# Altium PCB sonar_test.PcbDoc
Units mil, origin at the board's own origin, x right, y up, seen from the top; angles counter-clockwise.
Board outline 1630 x 1365 mil, 2 copper layers (Top Layer, Bottom Layer); 83 components, 50 nets, 234 pads, 77 vias.
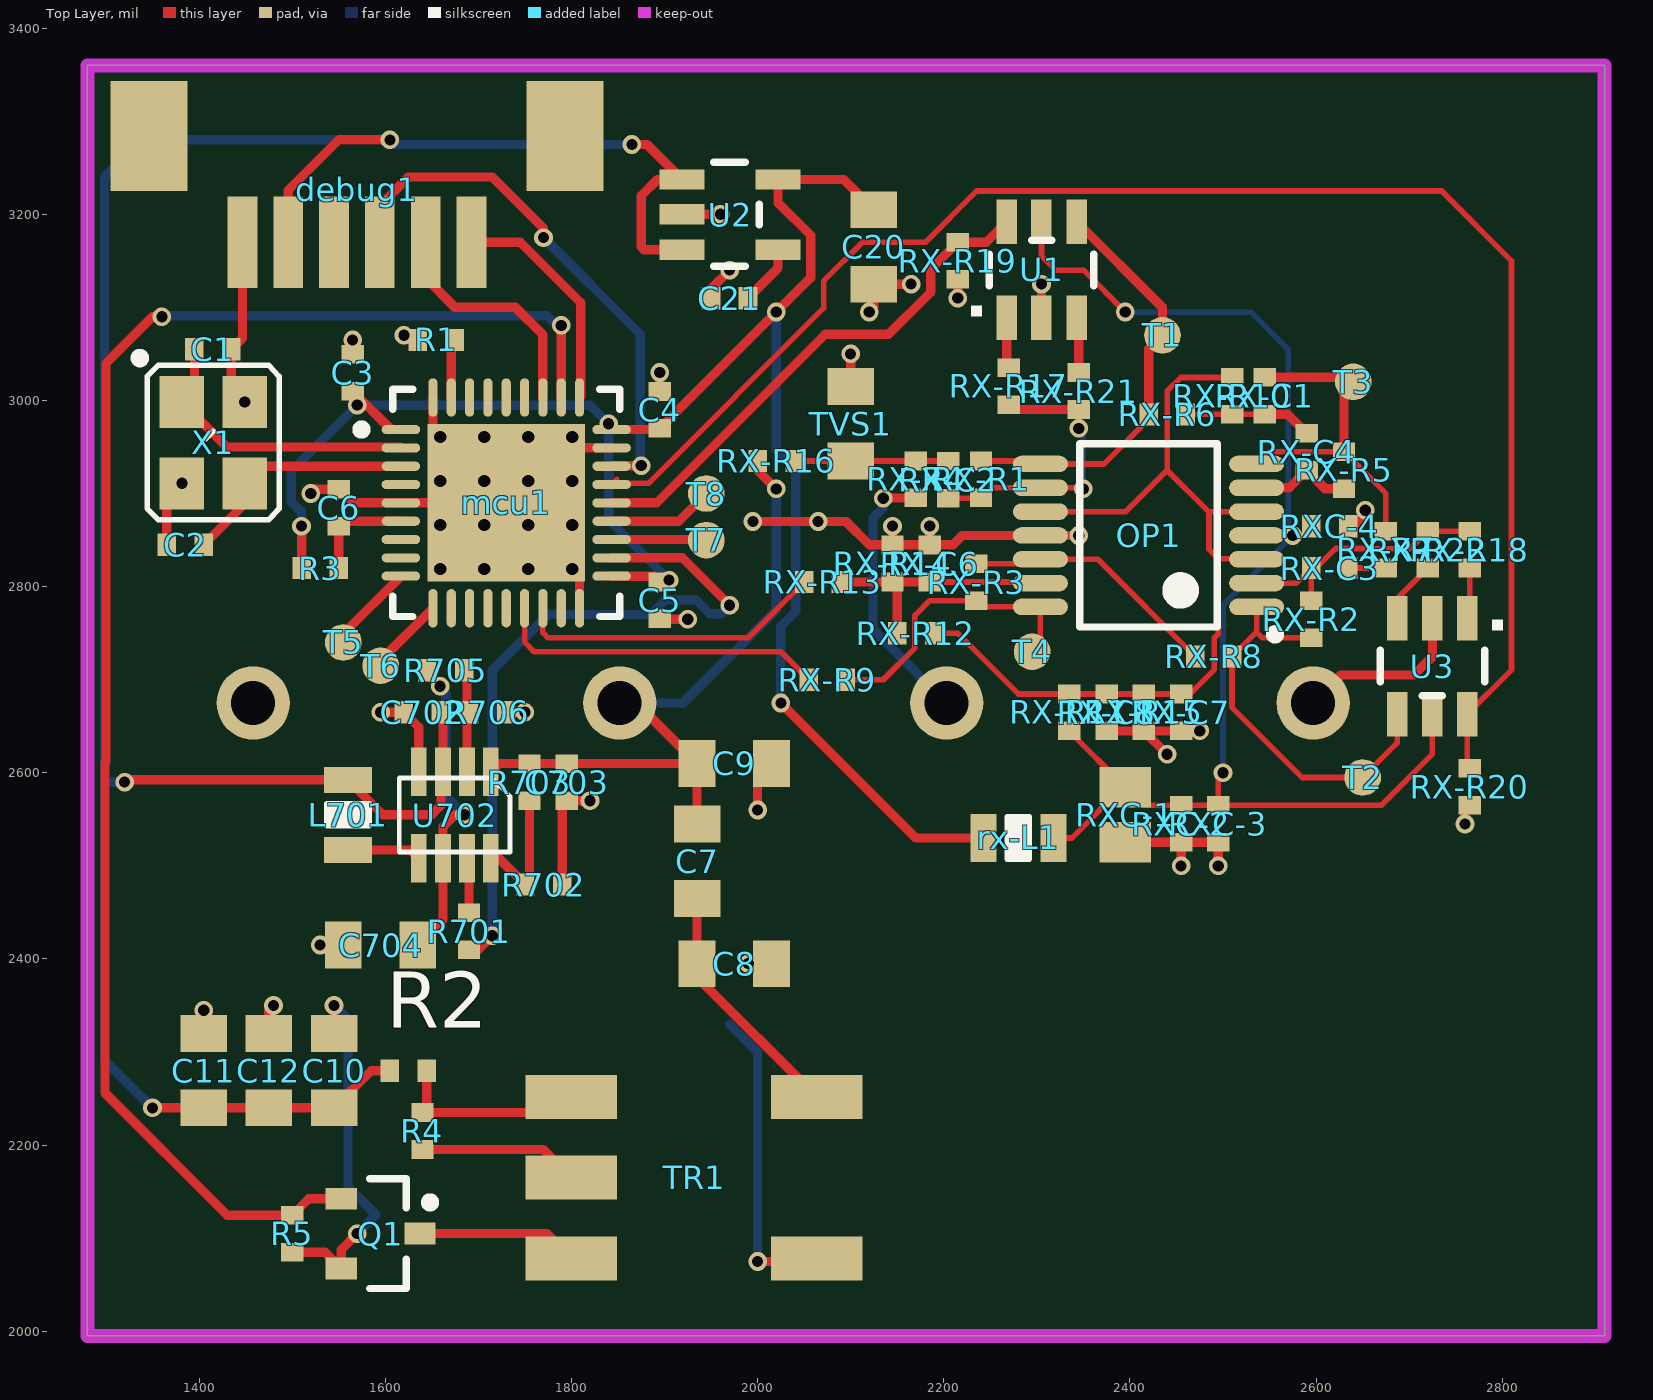
[diagram p0: Top Layer view]
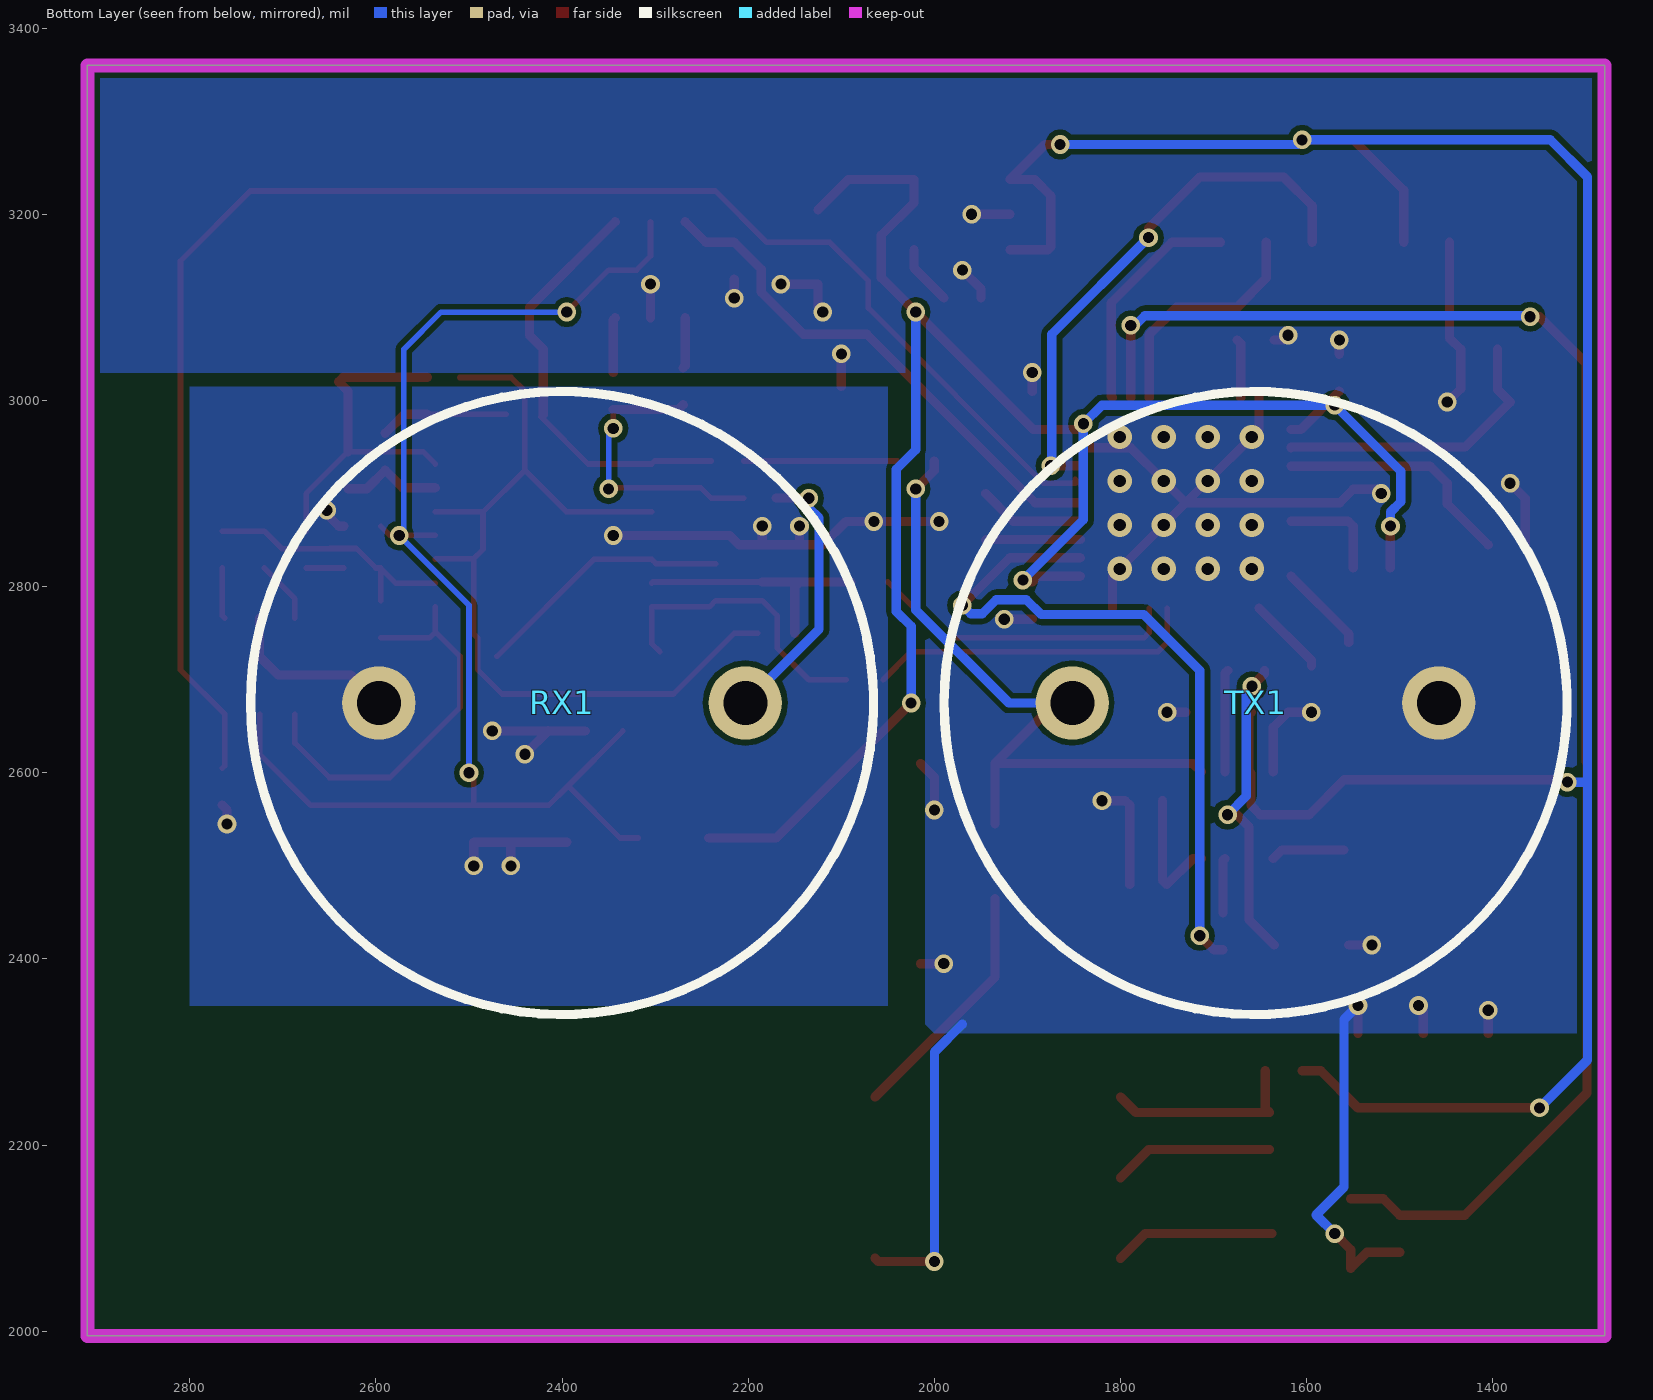
[diagram p1: Bottom Layer view, seen from below]

## Layer stack, top to bottom
Top Solder: solder mask 0.4, Solder Resist, Dk 3.5
Top Layer: signal copper 1.4
Dielectric 1: dielectric 12.6, FR-4, Dk 4.8
Bottom Layer: signal copper 1.4
Bottom Solder: solder mask 0.4, Solder Resist, Dk 3.5

## Board outline
1280,1995 2910,1995 2910,3360 1280,3360

## Design rules (kind name [scope] priority, off if disabled: settings)
Clearance [All] p1: gap=6
MinimumSolderMaskSliver [All] p1 off: minsoldermaskwidth=10
PlaneConnect [All] p1: planeconnectstyle=Direct reliefexpansion=20 reliefentries=4 reliefconductorwidth=10 reliefairgap=10
PolygonConnect [All] p1: connectstyle=Direct reliefconductorwidth=10 reliefentries=4 polygonreliefangle="90 Angle" airgapwidth=10
RoomDefinition MCU [InComponentClass('MCU')] p1 off: confinementstyle=ConfineIn formatcopy=TRUE lockcomponents=FALSE outline -15,-1020 1985,-1020 1985,-20 -15,-20
RoomDefinition sonar_tx [InComponentClass('sonar_tx')] p2 off: confinementstyle=ConfineIn formatcopy=TRUE lockcomponents=FALSE outline -15,-1020 1985,-1020 1985,-20 -15,-20
RoomDefinition sonar_rx [InComponentClass('sonar_rx')] p3 off: confinementstyle=ConfineIn formatcopy=TRUE lockcomponents=FALSE outline 7030,-45 7345,-45 7345,135 7030,135
RoutingVias [All] p1: holewidth=12 width=20 viastyle="Through Hole" minholewidth=12 minwidth=20 maxholewidth=28 maxwidth=50
SilkToBoardRegionClearance [All] p1 off:
SilkToSilkClearance [All] p1 off: silktosilkclearance=10
SilkToSolderMaskClearance [IsPad] p1 off: minsilkscreentomaskgap=10 clearancetoexposedcopper=TRUE
SolderMaskExpansion [All] p1: expansion=4
UnpouredPolygon [All] p1: allowunpoured=FALSE
Width [All] p1: maxlimit=10 minlimit=6 preferedwidth=6
24 further rules are at their usual default settings.

## Classes and differential pairs
component class MCU: C1 C2 C3 C4 C5 C6 C20 C21 debug1 mcu1 R1 R3 T5 T6 T7 T8 U2 X1
component class sonar_rx: OP1 RX1 RX-C1 RX-C2 RX-C3 RX-C4 RX-C6 RX-C7 RX-C8 rx-L1 RX-R1 RX-R2 RX-R3 RX-R4 RX-R5 RX-R6 RX-R7 RX-R8 RX-R9 RX-R10 RX-R11 RX-R12 RX-R13 RX-R14 RX-R15 RX-R16 RX-R17 RX-R18 RX-R19 RX-R20 RX-R21 RX-R22 RXC-1 RXC-2 RXC-3 RXC-4 T1 T2 T3 T4 TVS1 U1 U3
component class sonar_tx: C7 C8 C9 C10 C11 C12 C702 C703 C704 L701 Q1 R2 R4 R5 R701 R702 R703 R705 R706 TR1 TX1 U702

## Components (designator, comment, footprint, x,y, rotation, side; value= is the part's Value field where it differs from the comment)
C1 "Cap" 0402 1415,3055 r180 top
C2 "Cap" 0402 1385,2845 r0 top
C3 "Cap" 0402 1565,3030 r270 top
C4 "Cap" 0402 1895,2990 r270 top
C5 "Cap" 0402 1895,2785 r90 top
C6 "Cap" 0402 1550,2885 r270 top
C7 "Cap" 0805 1935,2505 r270 top
C8 "Cap" 0805 1975,2395 r0 top
C9 "Cap" 0805 1975,2610 r0 top
C10 "Cap" 0805 1545,2280 r90 top
C11 "Cap" 0805 1405,2280 r90 top
C12 "Cap" 0805 1475,2280 r90 top
C20 "Cap" 0805 2125,3165 r270 top
C21 "Cap" 0402 1970,3110 r180 top
C702 "1u" 0402 1640,2665 r180 top
C703 "5n6" 0402 1795,2590 r270 top
C704 "10uf/0805" 0805 1595,2415 r180 top
debug1 "debug" WFRSM125 1545,3170 r180 top
L701 "47uH/200mA" 0805-IND 1560,2555 r270 top
mcu1 "STM32F103T8U6" VFQN36_N 1730,2890 r0 top
OP1 "LM324" TSSOP14_44MM_065P 2420,2855 r180 top
Q1 "NMOS" SOT23_L 1595,2105 r0 top
R1 "Res2" 0402 1655,3065 r180 top
R2 "NC/0R" 0402 1625,2280 r180 top
R3 "Res2" 0402 1530,2820 r0 top
R4 "NC/0R" 0402 1640,2215 r90 top
R5 "10k" 0402 1500,2105 r270 top
R701 "10k" 0402 1690,2430 r270 top
R702 "10k" 0402 1770,2480 r0 top
R703 "100k" 0402 1755,2590 r270 top
R705 "453K 1%" 0402 1665,2710 r0 top
R706 "16.5k 1%" 0402 1710,2665 r0 top
RX1 "sonar" sonar-16mm 2400,2675 r180 bottom
RX-C1 "1nF" 0402 2545,3005 r90 top
RX-C2 "10nF" 0402 2205,2915 r270 top
RX-C3 "1nF" 0402 2615,2820 r180 top
RX-C4 "1nF" 0402 2590,2945 r270 top
RX-C6 "10nF" 0402 2185,2825 r270 top
RX-C7 "4.7uF" 0402 2455,2665 r270 top
RX-C8 "100nF" 0402 2375,2665 r270 top
rx-L1 "47uH" 0805-IND 2280,2530 r0 top
RX-R1 "91k" 0402 2240,2915 r90 top
RX-R2 "120k" 0402 2595,2765 r270 top
RX-R3 "120k" 0402 2235,2805 r270 top
RX-R4 "10k" 0402 2170,2915 r90 top
RX-R5 "36k" 0402 2630,2925 r90 top
RX-R6 "18k" 0402 2440,2985 r0 top
RX-R7 "10k" 0402 2675,2840 r270 top
RX-R8 "2k" 0402 2490,2725 r180 top
RX-R9 "1k /0R" 0402 2075,2700 r180 top
RX-R10 "430Ω" 0402 2510,3005 r270 top
RX-R11 "1k" 0402 2335,2665 r270 top
RX-R12 "120k" 0402 2170,2750 r180 top
RX-R13 "12k" 0402 2070,2805 r180 top
RX-R14 "3.3m" 0402 2145,2825 r270 top
RX-R15 "1k" 0402 2415,2665 r90 top
RX-R16 "NC/10k" 0402 2020,2935 r0 top
RX-R17 "91k" 0402 2270,3015 r90 top
RX-R18 "91k" 0402 2765,2840 r270 top
RX-R19 "91k" 0402 2215,3150 r90 top
RX-R20 "91k" 0402 2765,2585 r90 top
RX-R21 "91k" 0402 2345,3010 r90 top
RX-R22 "91k" 0402 2720,2840 r270 top
RXC-1 "47uF" C0805 2395,2555 r90 top
RXC-2 "1nF" 0402 2455,2545 r90 top
RXC-3 "10nF" 0402 2495,2545 r90 top
RXC-4 "100nF" 0402 2615,2865 r180 top
T1 "TestPad" "TestPad - 1mm" 2435,3070 r0 top
T2 "TestPad" "TestPad - 1mm" 2650,2595 r0 top
T3 "TestPad" "TestPad - 1mm" 2640,3020 r0 top
T4 "TestPad" "TestPad - 1mm" 2295,2730 r0 top
T5 "TestPad" "TestPad - 1mm" 1555,2740 r0 top
T6 "TestPad" "TestPad - 1mm" 1595,2715 r0 top
T7 "TestPad" "TestPad - 1mm" 1945,2850 r0 top
T8 "TestPad" "TestPad - 1mm" 1945,2900 r0 top
TR1 "Transformer_B78416A2232A003" Transformer_B78416A2232A003 1800,2165 r270 top
TVS1 "tvs/5V" 0805 2100,2975 r270 top
TX1 "sonar" sonar-16mm 1655,2675 r180 bottom
U1 "TS5A3159" SOT23-6 2305,3140 r0 top
U2 "LP5907" SOT23-5 1970,3200 r270 top
U3 "TS5A3159" SOT23-6 2725,2715 r180 top
U702 "LT3469" SOT23-8 1675,2555 r180 top
X1 "24.000 KHz 3.2x2.5mm 8-10pf" OSCILLATOR-3.2X2.5 1415,2955 r270 top

## Footprints (in the part's own frame and the unit in brackets; to place one, negate y for a bottom-side part, rotate by r counter-clockwise, add the part's x,y. Pads: shape width x height; smd on the part's side, far side on the other; paste and mask are expansions set on the pad)
0402 [mil] "0402-RES"
  rect 20x24 smd: 1(-19.69,0) 2(20,0)
0805 [mil]
  rect 39.37x50 smd: 1(-40,0) 2(40,0)
  body extent -50,-30 50,30, height 31
0805-IND [mil] "0805-IND"
  rect 28x52 smd: 1(-37.4,0) 2(38,0)
  silkscreen extent -12,-23 12,23
C0805 [mm] "Chip Capacitor, Body 2.0x1.3mm, IPC High Density"
  rect 1.1x1.4 smd: 1(-0.75,0) 2(0.75,0)
  body extent -1.1,-0.72 1.1,0.72, height 1.4
OSCILLATOR-3.2X2.5 [mil] "OSCILLATOR-3.2X2.5"
  rect 56x48 smd: 1(-43.31,-33.46) 2(44,-33.46) 3(44,34) 4(-43.31,34)
  silkscreen extent -95,-83 83,71
sonar-16mm [mm]
  round 2 hole 1.2: 1(-5,0) 2(5,0)
  silkscreen extent -8.5,-8.5 8.5,8.5, body extent -7.94,-7.98 8,7.98, height 12
SOT23-5 [mil] "SOT23-5"
  rect 22x48 smd: 1(-37.4,-51.18) 2(0,-51.18) 3(38,-51.18) 4(38,52) 5(-37.4,52)
  silkscreen extent -56,-17 56,32
SOT23-6 [mil] "SOT23-5"
  rect 22x48 smd: 1(-37.4,-51.18) 2(0,-51.18) 3(38,-51.18) 4(38,52) 5(0,52.01) 6(-37.4,52)
  silkscreen extent -76,-50 56,32
SOT23-8 [mil] "SOT23-8"
  rect 17x52 smd: 1(-38.39,-46.26) 2(-12.8,-46.26) 3(13,-46.26) 4(39,-46.26) 5(39,47) 6(13,47) 7(-12.8,47) 8(-38.39,47)
  silkscreen extent -59,-39 60,40
SOT23_L [mm] "SOT23, 3-Leads, Body 2.9x1.3mm, Pitch 0.95mm, Lead Span 2.3mm - Reverse Pinning, IPC High Density"
  rect 0.85x0.6 smd: 1(1.075,0) 2(-1.075,-0.95) 3(-1.075,0.95)
  silkscreen extent -0.3,-1.5 1.48,1.5, body extent -0.7,-1.5 0.7,1.5, height 1.1
"TestPad - 1mm" [mm]
  round 1 smd: 1(0,0)
Transformer_B78416A2232A003 [mm]
  rect 1.2x2.5 smd: 1(-2.2,0) 2(0,0) 3(2.2,0) 4(2.2,6.7) 5(-2.2,6.7)
TSSOP14_44MM_065P [mm]
  oval 1.5x0.45 smd: 1(-2.95,1.95) 2(-2.95,1.3) 3(-2.95,0.65) 4(-2.95,0) 5(-2.95,-0.65) 6(-2.95,-1.3) 7(-2.95,-1.95) 8(2.95,-1.95) 9(2.95,-1.3) 10(2.95,-0.65) 11(2.95,0) 12(2.95,0.65) 13(2.95,1.3) 14(2.95,1.95)
  silkscreen extent -3.58,-2.5 1.87,2.82
VFQN36_N [mm]
  rect 4.3x4.3 smd: 0(0,0)
  oval 1.05x0.25 smd: 1(-2.875,2) 2(-2.875,1.5) 3(-2.875,1) 4(-2.875,0.5) 5(-2.875,0) 6(-2.875,-0.5) 7(-2.875,-1) 8(-2.875,-1.5) 9(-2.875,-2) 19(2.875,-2) 20(2.875,-1.5) 21(2.875,-1) 22(2.875,-0.5) 23(2.875,0) 24(2.875,0.5) 25(2.875,1) 26(2.875,1.5) 27(2.875,2)
  oval 0.25x1.05 smd: 10(-2,-2.875) 11(-1.5,-2.875) 12(-1,-2.875) 13(-0.5,-2.875) 14(0,-2.875) 15(0.5,-2.875) 16(1,-2.875) 17(1.5,-2.875) 18(2,-2.875) 28(2,2.875) 29(1.5,2.875) 30(1,2.875) 31(0.5,2.875) 32(0,2.875) 33(-0.5,2.875) 34(-1,2.875) 35(-1.5,2.875) 36(-2,2.875)
  silkscreen extent -4.07,-3.1 3.1,3.1
WFRSM125 [mm]
  rect 0.81x2.5 smd: 1(-3.75,0) 2(-2.5,0) 3(-1.25,0) 4(0,0) 5(1.25,0) 6(2.5,0)
  rect 2.1x3 smd: shell(-6.3,-2.9) shell(5.05,-2.9)
  body extent -6.79,-3.82 5.46,0.38, height 3.4

## Part data
C1 C2 C3 C4 C5 C6 C7 C8 C9 C10 C11 C12 C20 C21: "Capacitor"
C702 RX-C7 RX-C8: library part CAP0603, "<b>Capacitor</b> / Standard 0603 ceramic capacitor, and 0.1\" leaded capacitor."
C703 C704: library part CAP0402, "<b>Capacitor</b> / Standard 0603 ceramic capacitor, and 0.1\" leaded capacitor."
L701 rx-L1: library part INDUCTOR0805, "<b>Inductors</b> / Basic Inductor/Choke - 0603 and 1210. Footprints are not proven and vary greatly between part numbers. / SRR1210: Bourns SRR1210 parts, e.g. SRR1210-100M"
mcu1: "STM32 ARM-based 32-bit MCU with 64 Kbytes Flash, 36-pin VFQFPN, Industrial Temperature"
OP1: library part OP-SOP14
R1 R3: "Resistor"
R2 R4 R5 R701 R702 R703 R705 R706: library part RESISTOR0402-RES, "<b>Resistor</b> / Basic schematic elements and footprints for 0603, 1206, and PTH 1/10th watt (small) resistors."
RX-C1 RX-C2 RX-C3 RX-C4 RX-C6 RXC-2 RXC-3 RXC-4: library part CAP0603H, "<b>Capacitor</b> / Standard 0603 ceramic capacitor, and 0.1\" leaded capacitor."
RX-R1 RX-R2 RX-R3 RX-R4 RX-R5 RX-R6 RX-R7 RX-R8 RX-R9 RX-R10 RX-R11 RX-R12 RX-R13 RX-R14 RX-R15 RX-R16 RX-R17 RX-R18 RX-R19 RX-R20 RX-R21 RX-R22: library part RESISTOR0603B, "<b>Resistor</b> / Basic schematic elements and footprints for 0603, 1206, and PTH 1/10th watt (small) resistors."
RXC-1: library part Cap2, "Capacitor"
TVS1: library part Diode, "Default Diode"
U702: "LT3469 Piezo microactuator driver with boost regulator"
X1: library part OSCILLATOR-3.2X2.5, "Crystal Oscillator in 3.2x2.5 SMD"

## Via types
v1: diameter 20, hole 12, Top Layer to Bottom Layer, 61 vias
v2: diameter 25.98, hole 12.99, Top Layer to Bottom Layer, tented both sides, 16 vias

## Nets (pads, with @x,y where several pads share a name; then routed paths per layer and width w, separated by ;. In a path a pad name is that pad's centre, name@x,y a point inside that pad or via, vN(x,y) a via of type N, cw(c..) or ccw(c..) an arc to the next point about the centre after c; other vN are vias at no path point)
3.3D: C3.2 C4.2 C5.2 C20.1 mcu1.1 mcu1.19 mcu1.27 R3.1 rx-L1.1 U2.5 | length 2048.4
  Top Layer w10: v1(1510,2865) 1510.32,2864.68 R3.1 ; C3.2 1606.26,2968.74 mcu1.1 ; mcu1.19 1888.74,2811.26 C5.2 1905,2805 v1(1905,2807) ; mcu1.27 1893.74,2968.74 C4.2 v1(2020,3095) 2057,3132 2057,3177.56 2022,3212.56 U2.5 2092.6,3237.4 C20.1 ; v1(2025,2675) 2170,2530 rx-L1.1
  Bottom Layer w10: v1(1510,2865) 1510,2880.3 1499,2891.3 1499,2924 v1(1570,2995) 1820,2995 v1(1840,2975) 1840,2872 v1(1905,2807) ; v1(2020,3095) 2020,2947 2041,2926 2041,2773.37 2025,2757.37 v1(2025,2675)
5V: C10.1 C11.1 C12.1 C702.1 debug1.5 L701.1 R2.2 U2.1 U2.3 U702.3 | length 2769.9
  Top Layer w10: v1(1320,2590) 1322.4,2592.4 L701.1 1597.4,2555 1650,2555 1660,2565 1660,2599.26 U702.3 1662,2662.69 C702.1 ; v1(1350,2240) C11.1 C12.1 C10.1 1585,2280 R2.2 ; debug1.5 1495.79,3225.79 1550,3280 v1(1605,3280) ; v1(1865,3275) 1881.22,3275 U2.1 1892.4,3237.4 1875,3220 1875,3165 1878,3162 U2.3
  Bottom Layer w10: v1(1320,2590) 1298.5,2590 ; v1(1350,2240) 1298.5,2291.5 1298.5,2590 ; v1(1865,3275) 1610,3275 v1(1605,3280) 1338.5,3280 1298.5,3240 1298.5,2590
GND: C1.1 C2.1 C3.1 C4.1 C5.1 C6.1 C8.2 C9.2 C10.2 C11.2 C12.2 C20.2 C21.2 C702.2 C703.2 C704.2 debug1.6 mcu1.0 mcu1.5 mcu1.18 mcu1.26 mcu1.36 OP1.11 Q1.2 R1.2 R5.2 R702.2 R706.2 RX1.1 RX-C6.1 RX-C7.2 RX-C8.2 RX-R14.1 RX-R15.1 RX-R19.1 RX-R20.1 RXC-1.1 RXC-2.1 RXC-3.1 RXC-4.1 TR1.4 TVS1.1 TX1.2 U1.2 U2.2 U3.2 U702.4 X1.2 X1.4 | length 3294.9
  Top Layer w10: C2.1 1365.32,2894.78 v1(1381.54,2911) ; C11.2 v1(1405,2345) ; debug1.6 1446.57,3066.89 C1.1 1434.69,3012.62 v1(1449,2998.31) ; C12.2 1475,2345 v1(1480,2350) ; R5.2 1535.28,2085 Q1.2 1552.68,2087.68 v1(1570,2105) ; v1(1520,2900) 1524.68,2904.68 C6.1 1564.68,2890 mcu1.5 mcu1.0 ; v1(1530,2415) C704.2 ; C10.2 v1(1545,2350) ; C3.1 v1(1565,3065) ; v1(1595,2665) C702.2 1636,2649 U702.4 ; v1(1620,3070) 1625,3065 R1.2 ; mcu1.36 1651.26,2968.74 v2(1659.13,2960.87) v2(1706.38,2913.62) mcu1.0 ; R706.2 v1(1750,2665) ; R702.2 1790,2565 C703.2 v1(1820,2570) ; mcu1.18 1808.74,2811.26 v2(1800.87,2819.13) v2(1753.62,2866.38) mcu1.0 ; mcu1.26 1789.06,2949.06 v2(1753.62,2913.62) mcu1.0 ; C5.1 1895.32,2765 v1(1925,2765) ; C4.1 v1(1895,3030) ; U2.2 v1(1960,3200) ; C21.2 1950,3120 v1(1970,3140) ; v1(1990,2395) C8.2 ; v1(1995,2870) v1(2065,2870) 2095,2870 2120,2845 RX-R14.1@2145,2845 ; v1(2000,2075) 2060.39,2075 TR1.4 ; v1(2000,2560) 2000,2595 C9.2 ; TVS1.1 v1(2100,3050) ; v1(2120,3095) 2125,3100 C20.2 v1(2165,3125) ; RX-R14.1 RX-R14.1@2145,2845 ; v1(2145,2865) RX-R14.1@2145,2845 ; RX-C6.1 RX-C6.1@2185,2845 ; v1(2185,2865) RX-C6.1@2185,2845 ; v1(2215,3110) RX-R19.1 ; U1.2 v1(2305,3125) ; v1(2345,2855) OP1.11 2220,2855 2210,2845 RX-C6.1@2185,2845 ; RX-C8.2 RX-R15.1@2415,2645 ; RXC-1.1 2494.84,2525.47 RXC-3.1 v1(2495,2500) ; RX-R15.1 RX-R15.1@2415,2645 ; v1(2440,2620) RX-R15.1@2415,2645 ; v1(2455,2500) RXC-2.1 ; v1(2475,2645) RX-C7.2 RX-R15.1@2415,2645 ; RX1.1 2626.85,2705 2705,2705 2725,2725 U3.2 ; RXC-4.1 2640,2865 2652.84,2877.84 v1(2652.84,2882.16) ; v1(2760,2545) 2760,2560.32 RX-R20.1 ; RX-R14.1@2145,2845 RX-C6.1@2185,2845
  Bottom Layer w10: v1(1545,2350) 1560,2335 1560,2155 1590,2125 v1(1570,2105) ; 1970,2330 2000,2300 v1(2000,2075)
  other v2: 1659.13,2819.13 1706.38,2819.13 1753.62,2819.13 1659.13,2866.38 1706.38,2866.38 1800.87,2866.38 1659.13,2913.62 1800.87,2913.62 1706.38,2960.87 1753.62,2960.87 1800.87,2960.87
NetC1_2: C1.2 mcu1.2 X1.1 | length 318.6
  Top Layer w10: C1.2 1395,3011.77 X1.1 1381.54,2998.22 1429.75,2950 1616.81,2950 mcu1.2
NetC2_2: C2.2 mcu1.3 X1.3 | length 259.6
  Top Layer w10: C2.2 1449,2889 X1.3 1467.37,2929.37 mcu1.3
NetC6_2: C6.2 mcu1.6 R3.2 | length 114
  Top Layer w10: R3.2 C6.2 1555.32,2870.32 mcu1.6
NetC7_1: C7.1 C9.1 C703.1 R703.1 RX-R16.1 TX1.1 U702.1 | length 778
  Top Layer w10: U702.1 1722.13,2610 C9.1 ; TX1.1 1870,2675 C9.1 ; C7.1 C9.1 ; RX-R16.1 2000.32,2924.68 v1(2020,2905)
  Bottom Layer w10: TX1.1 1920,2675 2020,2775 v1(2020,2905)
NetC7_2: C7.2 C8.1 TR1.5 | length 266.7
  Top Layer w10: C7.2 C8.1 1935,2380.39 TR1.5
NetC21_1: C21.1 U2.4 | length 65.4
  Top Layer w10: C21.1 2022,3142.31 U2.4
NetC704_1: C704.1 R705.1 U702.6 | length 338
  Top Layer w10: C704.1 1662,2442 U702.6 1662,2542 1675,2555 v1(1685,2555) ; R705.1 1645.32,2706.68 v1(1659,2693)
  Bottom Layer w10: v1(1659,2693) 1665,2687 1665,2575 v1(1685,2555)
Netdebug1_1: debug1.1 mcu1.28 | length 246.6
  Top Layer w10: debug1.1 1745,3170 1810,3105 1810,3004.45 mcu1.28
Netdebug1_2: debug1.2 mcu1.30 | length 257.1
  Top Layer w10: debug1.2 1643.43,3131.57 1675,3100 1740,3100 1769.37,3070.63 mcu1.30
Netdebug1_3: debug1.3 mcu1.25 | length 581.1
  Top Layer w10: debug1.3 1594.21,3209.21 1625,3240 1715,3240 1770,3185 v1(1770,3175) ; mcu1.25 1843.82,2930 v1(1875,2930)
  Bottom Layer w10: v1(1770,3175) 1874,3071 1874,2931 v1(1875,2930)
NetL701_2: L701.2 U702.5 | length 79.7
  Top Layer w10: L701.2 1627,2517 U702.5
Netmcu1_9: mcu1.9 T5.1 | length 96.9
  Top Layer w10: T5.1 1555,2749.45 mcu1.9
Netmcu1_10: mcu1.10 T6.1 | length 85.1
  Top Layer w10: T6.1 1595,2720.55 mcu1.10
Netmcu1_15: mcu1.15 RX-R9.2 | length 358.5
  Top Layer w6: mcu1.15 1749.69,2740.31 1760,2730 2025,2730 RX-R9.2
Netmcu1_16: mcu1.16 RX-R13.2 | length 334
  Top Layer w6: mcu1.16 1769.37,2750.63 1775,2745 1990,2745 RX-R13.2
Netmcu1_20: mcu1.20 R701.2 | length 760.5
  Top Layer w10: R701.2 1700,2410 v1(1715,2425) ; mcu1.20 1919.06,2830.94 v1(1970,2780)
  Bottom Layer w10: v1(1715,2425) 1715,2710 1775,2770 1885.3,2770 1901.3,2786 1933.7,2786 1948.7,2771 1961,2771 v1(1970,2780)
Netmcu1_21: mcu1.21 T7.1 | length 102.1
  Top Layer w10: mcu1.21 1944.37,2850.63 T7.1
Netmcu1_22: mcu1.22 T8.1 | length 114.1
  Top Layer w10: mcu1.22 1915.32,2870.32 T8.1
Netmcu1_23: mcu1.23 RX-R19.2 U1.6 | length 564
  Top Layer w10: mcu1.23 1891.6,2890 2072.6,3071 2140.7,3071 2186,3116.3 2186,3141 RX-R19.2 2245.6,3170 U1.6
Netmcu1_24: mcu1.24 RX-R20.2 U3.6 | length 1717.6
  Top Layer w6: mcu1.24 1848.87,2915.37 1848.87,2911 1882.87,2911 2071,3099.13 2071,3128.41 2112.59,3170 2180.27,3170 2235.28,3225.01 2734.99,3225.01 2810,3150 2810,2710.6 U3.6 2762.4,2607.6 RX-R20.2
Netmcu1_29: mcu1.29 Q1.3 R5.1 | length 1691.7
  Top Layer w10: v1(1360,3090) 1350,3090 1300,3040 1300,2612 1299,2611 1299,2256 1430.31,2124.69 R5.1 1517.72,2142.4 Q1.3 ; v1(1789,3080.7) 1789,3003.25 mcu1.29
  Bottom Layer w10: v1(1360,3090) 1361,3091 1774,3091 1784.3,3080.7 v1(1789,3080.7)
Netmcu1_35: mcu1.35 R1.1 | length 63.4
  Top Layer w10: mcu1.35 1670.94,3061.26 R1.1
NetOP1_1: OP1.1 RX-R2.2 RX-R8.1 T2.1 U3.4 | length 435.2
  Top Layer w6: OP1.1 2536.14,2751.46 ; RX-R2.2 2542.6,2745 2536.14,2751.46 ; U3.4 2687,2632 T2.1 2585,2595 2509.69,2670.31 RX-R8.1 2536.14,2751.46
NetOP1_2: OP1.2 RX-C3.2 RX-R2.1 RX-R18.1 RX-R22.1 | length 287.6
  Top Layer w6: OP1.2 2578.82,2803.82 RX-C3.2 ; RX-R2.1 RX-C3.2 ; RX-R18.1 RX-R22.1 2701,2840.69 2649.39,2840.69 2649.08,2841 2620.96,2841 2599.96,2820 RX-C3.2
NetOP1_3: OP1.3 OP1.5 OP1.10 RX-C7.1 RX-C8.1 RX-R10.1 RX-R11.1 RX-R12.1 RX-R15.2 | length 985.9
  Top Layer w6: RX-R12.1 2215,2750 2280.31,2684.69 RX-R11.1 RX-C8.1 RX-C7.1 2464.41,2684.69 2490.69,2710.96 2490.69,2745.04 2495,2749.36 2495,2830 ; OP1.10 2395.59,2880.59 2440,2925 ; RX-R10.1 2454.69,3024.69 2440,3010 2440,2925 ; OP1.3 2535.55,2830 2495,2830 ; OP1.5 2485.59,2880.59 2485,2880 ; 2440,2925 2485,2880 ; 2485,2880 2485,2840 2495,2830
NetOP1_6: OP1.6 RX-C4.2 RX-R5.1 | length 109.8
  Top Layer w10: OP1.6 2571.18,2906.18 RX-C4.2 2609.68,2905.32 RX-R5.1
NetOP1_7: OP1.7 RX-C1.2 RX-R5.2 RX-R7.1 T3.1 | length 379.5
  Top Layer w6: OP1.7 2549.37,2945 RX-R5.2 2675,2900 RX-R7.1
  Top Layer w10: RX-C1.2 2635,3025 T3.1 2630,3010 RX-R5.2
NetOP1_8: OP1.8 RX-R1.2 RX-R6.1 T1.1 U1.4 | length 456.4
  Top Layer w6: RX-R1.2 2300.63,2935 OP1.8 2372.09,2931.77 RX-R6.1@2422.82,2982.5
  Top Layer w10: U1.4 2435,3100 T1.1 2420.32,3055.32 RX-R6.1
NetOP1_9: OP1.9 RX-C2.2 RX-R1.1 RX-R17.1 RX-R21.1 | length 314.6
  Top Layer w6: RX-C2.2 2239.68,2895 RX-R1.1 2250.87,2906.18 OP1.9 2348.82,2906.18 v1(2350,2905) ; v1(2345,2970) RX-R21.1
  Top Layer w10: RX-R17.1 2275,2990.32 RX-R21.1
  Bottom Layer w6: v1(2345,2970) 2350,2965 v1(2350,2905)
NetOP1_12: OP1.12 RX-R3.1 RX-R8.2 | length 280.2
  Top Layer w6: RX-R3.1 2299.13,2824.69 OP1.12 2365.59,2829.41 RX-R8.2
NetOP1_13: OP1.13 RX-C6.2 RX-R12.2 RX-R13.1 RX-R14.2 | length 271.7
  Top Layer w6: RX-C6.2 2302.68,2805 OP1.13
  Top Layer w10: RX-R13.1 RX-R14.2 ; RX-R12.2 2150,2800 RX-R14.2 ; RX-C6.2 RX-R14.2
NetOP1_14: OP1.14 RX-R3.2 RX-R9.1 T4.1 | length 319.6
  Top Layer w6: RX-R9.1 2135,2700 2169,2734 2169,2769 2185,2785 RX-R3.2 2241.77,2778.23 OP1.14 2303.86,2738.86 T4.1
NetQ1_D: Q1.1 TR1.3 | length 173.7
  Top Layer w10: Q1.1 1773.39,2105 TR1.3
NetR2_1: R2.1 R4.2 TR1.1 | length 213.8
  Top Layer w10: R2.1 1644.68,2239.68 R4.2 1783.39,2235 TR1.1
NetR4_1: R4.1 TR1.2 | length 172.6
  Top Layer w10: R4.1 1769.68,2195.32 TR1.2
NetR701_1: R701.1 U702.7 | length 59.2
  Top Layer w10: U702.7 1690,2505.8 R701.1
NetR702_1: R702.1 R703.2 U702.8 | length 140.5
  Top Layer w10: U702.8 1722.32,2508 R702.1 1755,2484.68 R703.2
NetR705_2: R705.2 R706.1 U702.2 | length 109.9
  Top Layer w10: R705.2 1687.8,2707.2 U702.2
NetRX1_2: RX1.2 RX-R4.1 | length 292.5
  Top Layer w10: v1(2135,2895) 2135.32,2895.32 RX-R4.1
  Bottom Layer w10: v1(2135,2895) 2135,2884.7 2124,2873.7 2124,2754.15 RX1.2
NetRX-C1_1: RX-C1.1 RX-C4.1 RX-R6.2 RX-R10.2 | length 138.7
  Top Layer w6: RX-R6.2 RX-R10.2 2544.68,2985 RX-C1.1
  Top Layer w10: RX-C1.1 2569.37,2985.32 RX-C4.1
NetRX-C2_1: RX-C2.1 RX-R4.2 RX-R16.2 TVS1.2 | length 165.1
  Top Layer w6: RX-R16.2 TVS1.2 RX-R4.2 2204.69,2935 RX-C2.1
NetRX-C3_1: RX-C3.1 RX-R7.2 | length 40.3
  Top Layer w6: RX-C3.1 RX-R7.2
NetRX-R17_2: RX-R17.2 U1.1 | length 54.8
  Top Layer w10: U1.1 2267.6,3037.4 RX-R17.2
NetRX-R18_2: RX-R18.2 U3.1 | length 54.9
  Top Layer w6: U3.1 2765,2768.78 RX-R18.2
NetRX-R21_2: RX-R21.2 U1.3 | length 59.6
  Top Layer w10: U1.3 2345,3086.82 RX-R21.2
NetRX-R22_2: RX-R22.2 U3.3 | length 67.5
  Top Layer w6: U3.3 2687,2787 RX-R22.2
VCC-RX: OP1.4 rx-L1.2 RX-R11.2 RXC-1.2 RXC-2.2 RXC-3.2 RXC-4.2 U1.5 U3.5 | length 1520.4
  Top Layer w6: U1.5 2305,3155 2320,3140 2350,3140 v1(2395,3095) ; rx-L1.2 2337.59,2530 2392.12,2584.53 RXC-1.2 ; RX-R11.2 2335,2644.53 RXC-1.2 ; v1(2500,2600) 2495,2595 RXC-3.2 ; OP1.4 v1(2575,2855) 2585,2855 RXC-4.2 ; U3.5 2725,2620 2670,2565 RXC-3.2 ; RXC-1.2 2414.53,2565 RXC-2.2 RXC-3.2
  Bottom Layer w6: v1(2395,3095) 2530,3095 2570,3055 2570,2860 v1(2575,2855) 2500,2780 v1(2500,2600)
pads on no net: debug1.4 debug1.shell mcu1.4 mcu1.7 mcu1.8 mcu1.11 mcu1.12 mcu1.13 mcu1.14 mcu1.17 mcu1.31 mcu1.32 mcu1.33 mcu1.34

## Polygon pours and split planes (outlines as drawn)
GND on Bottom Layer "Top Layer-No Net" (solid, remove dead copper, pour order 2): 1260,3395 1275,3380 2990,3380 2990,3000 2985,2995 2950,3030 2010,3030 2010,2330 2000,2320 1260,2320
GND on Bottom Layer "Top Layer-No Net" (solid, remove dead copper, pour order 4): 2800,2350 2800,3015 2050,3015 2050,2350

## Keep-outs
Keep-Out Layer:
  the board outline again, w15